# Altium PCB ServoBoard.PcbDoc
Units mm, origin at the board's own origin, x right, y up, seen from the top; angles counter-clockwise.
Board outline 152.4 x 101.6 mm, 2 copper layers (Top Layer, Bottom Layer); 39 components, 30 nets, 156 pads, 0 vias.
Unrouted connection lines stored in the file: 112.
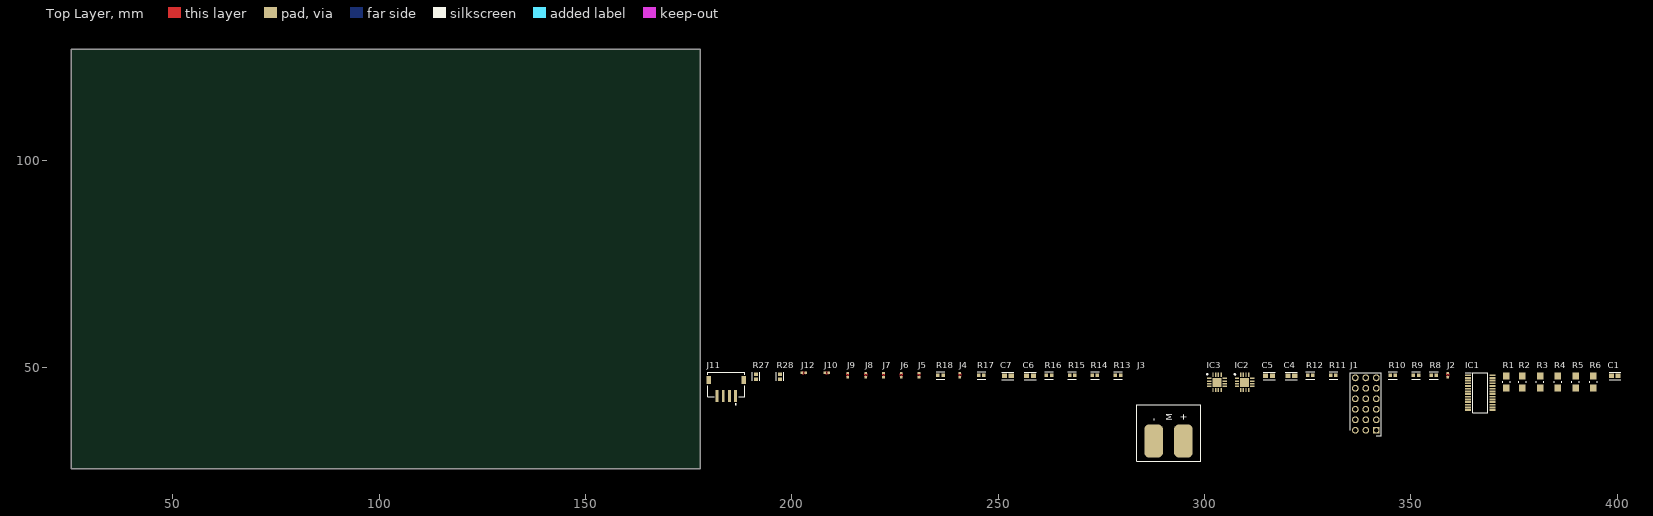
[diagram p0: Top Layer view]
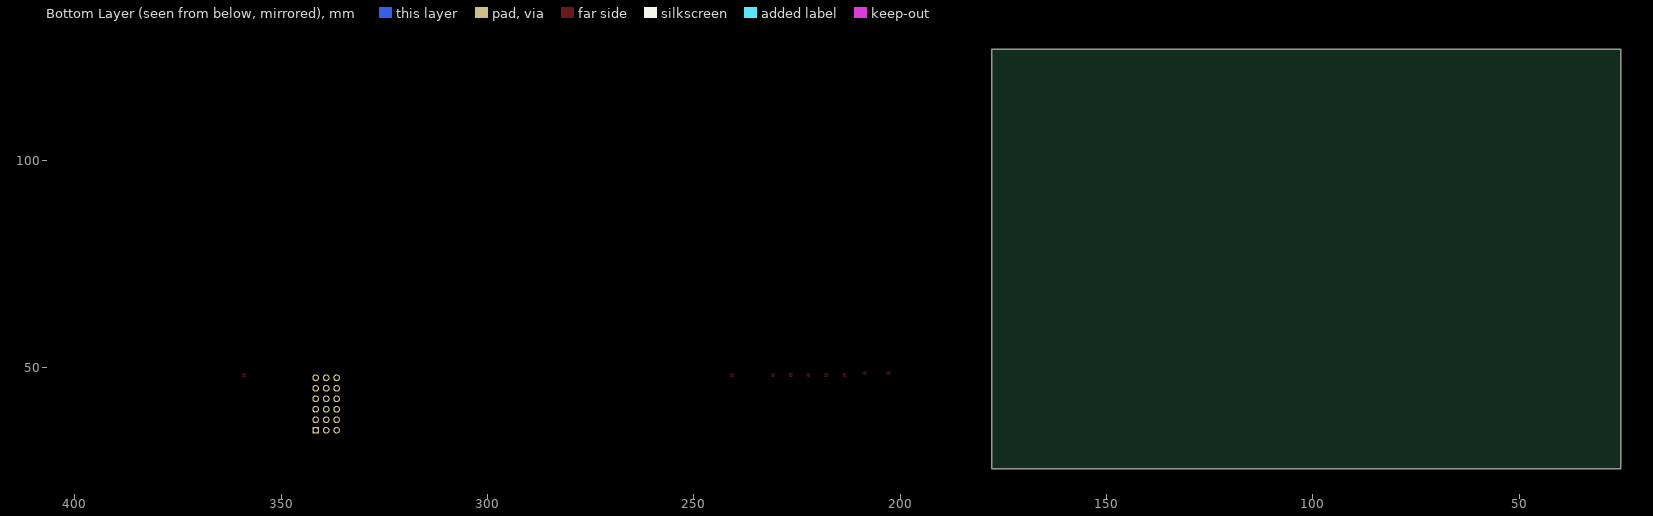
[diagram p1: Bottom Layer view, seen from below]

## Layer stack, top to bottom
Top Solder: solder mask 0.0102, Solder Resist, Dk 3.5
Top Layer: signal copper 0.0356
Dielectric 1: dielectric 0.32, FR-4, Dk 4.8
Bottom Layer: signal copper 0.0356
Bottom Solder: solder mask 0.0102, Solder Resist, Dk 3.5

## Board outline
25.4,25.4 177.8,25.4 177.8,127 25.4,127

## Design rules (kind name [scope] priority, off if disabled: settings)
BoardOutlineClearance [All] p1: gap=0.2 ignorepadtopadclearanceinfootprint=FALSE
Clearance [All] p1: gap=0.127 ignorepadtopadclearanceinfootprint=FALSE except(0.25: Arc-Hole Track-Hole SMDPad-Hole THPad-Hole Via-Hole Fill-Hole Poly-Hole Region-Hole Text-Hole)
ComponentClearance [All] p1: gap=0.127 collisioncheckmode=3 verticalgap=0.127 showdistances=TRUE
DiffPairsRouting [All] p1: maxlimit=0.254 minlimit=0.127 mostfreqgap=0.127 toplayer_minwidth=0.127 toplayer_maxwidth=25.4 toplayer_prefwidth=0.127 bottomlayer_minwidth=0.127 bottomlayer_maxwidth=25.4 bottomlayer_prefwidth=0.127 maxuncoupledlength=12.7
Height [All] p1: minheight=0 maxheight=1816.048 prefheight=12.7
HoleSize [All] p1: absolutevalues=TRUE maxlimit=6.3 minlimit=0.3 maxpercent=80.000 minpercent=20.000
HoleToHoleClearance [All] p1: gap=0.25 allowstackedmicrovias=FALSE
MinimumAnnularRing [All] p1: minimumring=0.076
MinimumSolderMaskSliver [All] p1: minsoldermaskwidth=0
PlaneClearance [All] p1: clearance=0.127
PlaneConnect PlaneConnectPowerPads [InPadClass('PowerPads')] p1: planeconnectstyle=Direct reliefexpansion=0.508 reliefentries=4 reliefconductorwidth=0.254 reliefairgap=0.254
PlaneConnect [All] p2: pad.planeconnectstyle=Relief pad.reliefexpansion=0.3 pad.reliefentries=4 pad.reliefconductorwidth=0.127 pad.reliefairgap=0.127 via.planeconnectstyle=Direct via.reliefexpansion=0.3 via.reliefentries=4 via.reliefconductorwidth=0.127 via.reliefairgap=0.127
PolygonConnect PolygonConnectPowerPads [All vs (InPadClass('PowerPads'))] p1: connectstyle=Direct reliefconductorwidth=0.254 reliefentries=4 polygonreliefangle="90 Angle" airgapwidth=0.254
PolygonConnect [All] p2: thpad.connectstyle=Relief thpad.reliefconductorwidth=0.127 thpad.reliefentries=4 thpad.polygonreliefangle="90 Angle" thpad.airgapwidth=0.127 smdpad.connectstyle=Relief smdpad.reliefconductorwidth=0.127 smdpad.reliefentries=4 smdpad.polygonreliefangle="90 Angle" smdpad.airgapwidth=0.127 via.connectstyle=Direct via.reliefconductorwidth=0.127 via.reliefentries=4 via.polygonreliefangle="90 Angle" via.airgapwidth=0.127
RoutingVias [All] p1: holewidth=0.3 width=0.6 viastyle="Through Hole" minholewidth=0.3 minwidth=0.6 maxholewidth=0.6 maxwidth=6.6
SilkToSilkClearance [All] p1: silktosilkclearance=0
SilkToSolderMaskClearance [IsPad] p1: minsilkscreentomaskgap=0.127 clearancetoexposedcopper=TRUE
SolderMaskExpansion [All] p1: expansion=0.075 istentingtop=FALSE
Width [All] p1: maxlimit=25.4 minlimit=0.127 preferedwidth=0.127 minimp=50.000000 maximp=50.000000 favimp=50.000000
20 further rules are at their usual default settings.

## Components (designator, comment, footprint, x,y, rotation, side; value= is the part's Value field where it differs from the comment)
C1 "10uF" FP-GRM188-0_1-e0_2_0_55-IPC_A 399.399,47.9 r0 top
C4 "0.1uF" FP-GCJ188-0_2-IPC_A 320.999,47.9 r0 top
C5 "0.1uF" FP-GCJ188-0_2-IPC_A 315.599,47.9 r0 top
C6 "0.1uF" FP-GCJ188-0_2-IPC_A 257.699,47.9 r0 top
C7 "0.1uF" FP-GCJ188-0_2-IPC_A 252.299,47.9 r0 top
IC1 "PCA9685PW,112" SOP65P640X110-28N 366.799,43.8 r0 top
IC2 "INA3221AIRGVR" QFN65P400X400X100-17N-D 309.699,46.3 r0 top
IC3 "INA3221AIRGVR" QFN65P400X400X100-17N-D 302.999,46.3 r0 top
J1 "TSW-106-07-L-T" HDRV18W64P254_3X6_1524X749X838P 341.599,34.7 r90 top
J2 "JUMPER" JUMPER 358.899,48 r0 top
J3 "XT60PT-M" XT60PT-M 291.299,38 r90 top
J4 "JUMPER" JUMPER 240.7,48 r0 top
J5 "JUMPER" JUMPER 230.8,48 r0 top
J6 "JUMPER" JUMPER 226.5,48 r0 top
J7 "JUMPER" JUMPER 222.2,48 r0 top
J8 "JUMPER" JUMPER 217.9,48 r0 top
J9 "JUMPER" JUMPER 213.5,48 r0 top
J10 "JUMPER" JUMPER 208.5,48.6 r90 top
J11 "S4B-ZR-SM4A-TF(LF)(SN)" FP-S4B-ZR-SM4A-TF_LF_SN-MFG 184.1,45.8 r0 top
J12 "JUMPER" JUMPER 202.9,48.6 r90 top
R1 "10mOhm" FP-ERJ8CW-MFG 373.099,46.4 r90 top
R2 "10mOhm" FP-ERJ8CW-MFG 376.999,46.4 r90 top
R3 "10mOhm" FP-ERJ8CW-MFG 381.299,46.4 r90 top
R4 "10mOhm" FP-ERJ8CW-MFG 385.599,46.4 r90 top
R5 "10mOhm" FP-ERJ8CW-MFG 389.899,46.4 r90 top
R6 "10mOhm" FP-ERJ8CW-MFG 394.199,46.4 r90 top
R8 "10k Ohm" FP-ERA3A-IPC_C 355.499,48 r0 top
R9 "10k Ohm" FP-ERA3A-IPC_C 351.199,48 r0 top
R10 "10k Ohm" FP-ERA3A-IPC_C 345.599,48 r0 top
R11 "10kOhm" FP-ERA3A-IPC_C 331.199,48 r0 top
R12 "10k Ohm" FP-ERA3A-IPC_C 325.599,48 r0 top
R13 "10kOhm" FP-ERA3A-IPC_C 278.999,48 r0 top
R14 "10k Ohm" FP-ERA3A-IPC_C 273.399,48 r0 top
R15 "10kOhm" FP-ERA3A-IPC_C 267.899,48 r0 top
R16 "10kOhm" FP-ERA3A-IPC_C 262.299,48 r0 top
R17 "10kOhm" FP-ERA3A-IPC_C 245.9,48 r0 top
R18 "10kOhm" FP-ERA3A-IPC_C 236,48 r0 top
R27 "10k Ohm" FP-ERA3A-IPC_C 191.3,47.7 r90 top
R28 "10k Ohm" FP-ERA3A-IPC_C 197.1,47.7 r90 top

## Footprints (in the part's own frame and the unit in brackets; to place one, negate y for a bottom-side part, rotate by r counter-clockwise, add the part's x,y. Pads: shape width x height; smd on the part's side, far side on the other; paste and mask are expansions set on the pad)
FP-ERA3A-IPC_C [mm]
  rect 0.855x0.906 smd paste+0 mask+0: 1(-0.626,0) 2(0.626,0)
  silkscreen extent -1.05,-0.9 1.05,0.9, body extent -1.15,-0.6 1.15,0.6, height 0.25
FP-ERJ8CW-MFG [mm]
  rect 1.75x1.55 smd paste+0 mask+0: 1(-1.475,0) 2(1.475,0)
  silkscreen extent -0.23,-0.9 0.23,0.9, body extent -2.45,-1 2.45,1, height 0.25
FP-GCJ188-0_2-IPC_A [mil]
  rect 49.42x39.85 smd paste+0 mask+0: 1(-32.5,0) 2(32.5,0)
  silkscreen extent -57,-36 57,36, body extent -77,-40 77,40, height 10
FP-GRM188-0_1-e0_2_0_55-IPC_A [mm]
  rect 1.208x1.012 smd paste+0 mask+0: 1(-0.802,0) 2(0.802,0)
  silkscreen extent -1.41,-0.91 1.41,0.91, body extent -1.91,-1.01 1.91,1.01, height 0.25
FP-S4B-ZR-SM4A-TF_LF_SN-MFG [mm]
  rect 0.7x2.9 smd paste+0 mask+0: 1(2.25,-2.75) 2(0.75,-2.75) 3(-0.75,-2.75) 4(-2.25,-2.75)
  rect 1.1x1.9 smd paste+0 mask+0: 5(-4.2,1.05) 6(4.2,1.05)
  silkscreen extent -4.5,-4.9 4.5,3, body extent -4.85,-4.3 4.85,3.1, height 0.25
HDRV18W64P254_3X6_1524X749X838P [mm]
  rect 1.65x1.65 hole 1.1: 1(0,0)
  round 1.65 hole 1.1: 2(0,2.54) 3(0,5.08) 4(2.54,0) 5(2.54,2.54) 6(2.54,5.08) 7(5.08,0) 8(5.08,2.54) 9(5.08,5.08) 10(7.62,0) 11(7.62,2.54) 12(7.62,5.08) 13(10.16,0) 14(10.16,2.54) 15(10.16,5.08) 16(12.7,0) 17(12.7,2.54) 18(12.7,5.08)
  silkscreen extent -1.27,-1.2 13.97,6.28, body extent -1.27,-1.2 13.97,6.28, height 8.38
JUMPER [mm]
  rect 0.65x0.55 smd paste-2.54 mask-2.54: 1(0,-0.45) 2(0,0.55)
  Top Layer region: -0.325,0 0,0.325 0.325,0 0.325,0.358 -0.325,0.358
  Top Layer region: -0.325,-0.339 0.003,-0.011 0.325,-0.339
QFN65P400X400X100-17N-D [mm]
  rect 1.05x0.35 smd: 1(-1.85,0.975) 2(-1.85,0.325) 3(-1.85,-0.325) 4(-1.85,-0.975) 9(1.85,-0.975) 10(1.85,-0.325) 11(1.85,0.325) 12(1.85,0.975)
  rect 0.35x1.05 smd: 5(-0.975,-1.85) 6(-0.325,-1.85) 7(0.325,-1.85) 8(0.975,-1.85) 13(0.975,1.85) 14(0.325,1.85) 15(-0.325,1.85) 16(-0.975,1.85)
  rect 2.2x2.2 smd: 17(0,0)
  silkscreen extent -2.54,1.79 -2.21,2.11, body extent -2.05,-2.05 2.05,2.05, height 1
SOP65P640X110-28N [mm]
  rect 1.475x0.45 smd: 1(-2.938,4.225) 2(-2.938,3.575) 3(-2.938,2.925) 4(-2.938,2.275) 5(-2.938,1.625) 6(-2.938,0.975) 7(-2.938,0.325) 8(-2.938,-0.325) 9(-2.938,-0.975) 10(-2.938,-1.625) 11(-2.938,-2.275) 12(-2.938,-2.925) 13(-2.938,-3.575) 14(-2.938,-4.225) 15(2.938,-4.225) 16(2.938,-3.575) 17(2.938,-2.925) 18(2.938,-2.275) 19(2.938,-1.625) 20(2.938,-0.975) 21(2.938,-0.325) 22(2.938,0.325) 23(2.938,0.975) 24(2.938,1.625) 25(2.938,2.275) 26(2.938,2.925) 27(2.938,3.575) 28(2.938,4.225)
  silkscreen extent -3.67,-4.85 1.85,4.85, body extent -3.2,-4.85 3.2,4.85, height 1.1
XT60PT-M [mm]
  rect 1x1 hole 1.5 square: 8(1.15,6.75) 8(1.15,-6.65)
  rrect50% 8x4.5 smd: +(-5.9,-3.55) -(-5.9,3.65)
  silkscreen extent -10.8,-7.7 2.85,7.8

## Part data
C1: library part CMP-2006-02792-2, "Chip Multilayer Ceramic Capacitors for General Purpose, 0603, 10uF, X5R, 15%, 20%, 6.3V", Case Code (Imperial)=0603, Case Code (Metric)=1608, Dielectric=X5R, Max Operating Temperature=85°C, Min Operating Temperature=-55°C, Package Quantity=4000, Tolerance=20%, Voltage=6.3V, Capacitance=10uF, Case/Package=0603, Depth=0.8mm, Height=0.8mm, Lead Free="Lead Free", Length=1.6mm, Material=Ceramic, Mount="Surface Mount", Packaging="Tape and Reel", Radiation Hardening=No, REACH SVHC="No SVHC", Termination=SMD/SMT, Thickness=0.035inch, Voltage Rating=6.3V, Voltage Rating (DC)=6.3V, Width=0.031inch
C4 C5 C6 C7: library part CMP-06035-047895-1, "Cap Ceramic 0.1uF 100V X7R 10% Pad SMD 0603 Soft Termination +125°C Automotive T/R", Capacitance=100nF, Case Code (Imperial)=0603, Case Code (Metric)=1608, Max Operating Temperature=125°C, Min Operating Temperature=-55°C, Ratings=AEC-Q200, Tolerance=10%, Voltage Rating=100V, Case/Package=0603, Features="Soft Termination", Lead Free="Lead Free", Length=0.063inch, Mount="Surface Mount", Packaging="Tape and Reel", Thickness=0.035inch, Width=0.031inch
IC1: "Integrated Circuit", Manufacturer_Name=NXP, Mouser Part Number=771-PCA9685PW,112, Arrow Part Number=PCA9685PW,112, Arrow Price/Stock=https://www.arrow.com/en/products/pca9685pw112/nxp-semiconductors?region=nac, Datasheet Link=http://www.nxp.com/docs/en/data-sheet/PCA9685.pdf, Height=1.1mm, Manufacturer_Part_Number=PCA9685PW,112, Mouser Price/Stock=https://www.mouser.co.uk/ProductDetail/NXP-Semiconductors/PCA9685PW112?qs=6YAT8rHPFU9wZqiAeiOMZw%3D%3D
IC2 IC3: "Integrated Circuit", Manufacturer_Name="Texas Instruments", Mouser Part Number=595-INA3221AIRGVR, Arrow Part Number=INA3221AIRGVR, Arrow Price/Stock=https://www.arrow.com/en/products/ina3221airgvr/texas-instruments?region=nac, Datasheet Link=http://www.ti.com/lit/ds/symlink/ina3221.pdf, Height=1mm, Manufacturer_Part_Number=INA3221AIRGVR, Mouser Price/Stock=https://www.mouser.co.uk/ProductDetail/Texas-Instruments/INA3221AIRGVR?qs=3AcK5DacLboHys8907TVUQ%3D%3D
J1: "Connector", Manufacturer_Name=SAMTEC, Mouser Part Number=200-TSW10607LT, Arrow Part Number=TSW-106-07-L-T, Arrow Price/Stock=https://www.arrow.com/en/products/tsw-106-07-l-t/samtec, Datasheet Link=http://suddendocs.samtec.com/catalog_english/tsw_th.pdf, Height=8.38mm, Manufacturer_Part_Number=TSW-106-07-L-T, Mouser Price/Stock=https://www.mouser.co.uk/ProductDetail/Samtec/TSW-106-07-L-T?qs=rU5fayqh%252BE39iyDwG6o8Cg%3D%3D
J2 J4 J5 J6 J7 J8 J9 J10 J12: library part CMP-009-00061-2, Pins=2
J3: "Male SMT XT60 Connector"
J11: library part CMP-17439-000081-1, "CONN HEADER SMD R/A 4POS 1.5MM", Color=Natural, Contact Resistance=30mR, Current Rating=1A, Flammability Rating="UL94 V-0", Housing Color=Beige, Max Operating Temperature=85°C, Max Voltage Rating (AC)=50V, Min Operating Temperature=-25°C, Connector Type=Header, Contact Finish - Mating=TIN, Contact Material=Brass, Contact Plating=Copper, Contact Shape=Circular, Contact Type="Male Pin", Depth=6.5mm, Fastening Type=Detent, Gender=Male, Height=7.2mm, Housing Material=Polyamide, Insulation Color=Natural, Insulation Material=Nylon, Lead Free="Lead Free", Length=9mm, Max Current Rating=1A, Max Voltage Rating (DC)=50V, Mount="Surface Mount", Number of Contacts=4, Number of Positions=4, Number of Rows=1, Orientation="Right Angle", Packaging="Tape and Reel", Pitch=1.5mm, Series=ZH, Termination=Solder, Voltage Rating=50V, Width=3.5mm
R1 R2 R3 R4 R5 R6: library part CMP-2003-00786-2, "RES 0.01 OHM 1% 1W 1206", Case Code (Imperial)=1206, Case Code (Metric)=3216, Max Operating Temperature=125°C, Max Power Dissipation=1W, Min Operating Temperature=-55°C, Resistance=10mR, Resistor Type="Thick Film", Temperature Coefficient=75ppm/°C, Tolerance=1%, Case/Package=1206, Depth=1.6mm, Features="Automotive AEC-Q200", Height=0.03inch, Lead Free="Lead Free", Length=3.2mm, Military Standard=Not, Mount="Surface Mount", Number of Terminations=2, Packaging="Cut Tape", Power Rating=1W, REACH SVHC="No SVHC", Termination=Flat, Width=0.063inch
R8 R9 R10 R11 R12 R13 R14 R15 R16 R17 R18 R27 R28: library part CMP-2000-00874-2, "RES SMD 10K OHM 0.1% 1/10W 0603", Case Code (Imperial)=0603, Case Code (Metric)=1608, Max Operating Temperature=155°C, Max Power Dissipation=100mW, Min Operating Temperature=-55°C, Package Quantity=5000, Resistance=10kR, Resistance Tolerance=0.1%, Resistor Type="Thin Film", Temperature Coefficient=25ppm/°C, Voltage Rating=75V, Case/Package=0603, Construction=Rectangular, Contact Plating=Tin, Depth=0.8mm, Height=0.45mm, Lead Free="Lead Free", Length=1.6mm, Military Standard=Not, Mount="Surface Mount", Number of Pins=2, Number of Terminations=2, Packaging="Tape and Reel", Power Rating=100mW, Radiation Hardening=No, REACH SVHC="No SVHC", RoHS Compliant=Yes, Series=ERA-3A, Size Code=0603, Technology="METAL FILM", Termination=SMD/SMT, Tolerance=0.1%, Voltage Rating (DC)=75V, Width=0.8mm

## Nets (pads, with @x,y where several pads share a name; then routed paths per layer and width w, separated by ;. In a path a pad name is that pad's centre, name@x,y a point inside that pad or via, vN(x,y) a via of type N, cw(c..) or ccw(c..) an arc to the next point about the centre after c; other vN are vias at no path point)
+5: C1.1 C4.2 C5.2 C6.2 C7.2 IC1.24 IC1.28 IC2.4 IC2.16 IC3.4 IC3.16 J2.2 J4.2 J5.2 J11.1 R11.2 R12.2 R13.1 R14.1 R15.1 R16.1 R17.1 R18.1 R27.2 R28.2
CurrMon_1-: IC3.11 J1.2 R1.1
CurrMon_2-: IC3.14 J1.5 R2.1
CurrMon_3-: IC3.1 J1.8 R3.1
CurrMon_4-: IC2.11 J1.11 R4.1
CurrMon_5-: IC2.14 J1.14 R5.1
CurrMon_6-: IC2.1 J1.17 R6.1
GND: C1.2 C4.1 C5.1 C6.1 C7.1 IC1.14 IC1.25 IC2.3 IC2.17 IC3.3 IC3.17 J1.3 J1.6 J1.9 J1.12 J1.15 J1.18 J3.- J6.2 J7.2 J11.4 R8.2 R9.2 R10.2
NetIC1_1: IC1.1 IC1.2 IC1.3 IC1.4 R8.1
NetIC1_5: IC1.5 J2.1 R9.1
NetIC1_6: IC1.6 J1.1
NetIC1_7: IC1.7 J1.4
NetIC1_8: IC1.8 J1.7
NetIC1_9: IC1.9 J1.10
NetIC1_10: IC1.10 J1.13
NetIC1_11: IC1.11 J1.16
NetIC1_23: IC1.23 R10.1
NetIC1_26: IC1.26 IC2.6 IC3.6 J10.2 J11.3 J12.2 R27.1
NetIC1_27: IC1.27 IC2.7 IC3.7 J8.2 J9.2 J11.2 R28.1
NetIC2_5: IC2.5 J4.1 J6.1 J8.1 J10.1
NetIC2_8: IC2.8 R17.2
NetIC2_9: IC2.9 R15.2
NetIC2_10: IC2.10 R13.2
NetIC2_13: IC2.13 R11.1
NetIC3_5: IC3.5 J5.1 J7.1 J9.1 J12.1
NetIC3_8: IC3.8 R18.2
NetIC3_9: IC3.9 R16.2
NetIC3_10: IC3.10 R14.2
NetIC3_13: IC3.13 R12.1
VCC: IC2.2 IC2.12 IC2.15 IC3.2 IC3.12 IC3.15 J3.+ R1.2 R2.2 R3.2 R4.2 R5.2 R6.2
pads on no net: IC1.12 IC1.13 IC1.15 IC1.16 IC1.17 IC1.18 IC1.19 IC1.20 IC1.21 IC1.22 J3.8 J11.5 J11.6

## Text inside footprints (layer, text, board x,y; h text height)
J3: Top Overlay "+" at 295.649,37 h1.5 r90; Top Overlay "-" at 288.399,36.9 h1.5 r90; Top Overlay "M" at 292.115,37.057 h1.5 r90; Mechanical 1 "PCB Edge" at 292.899,41 h0.5 r180